# Altium PCB 175-00065revB - PCB, Sinistro Camera Controller Extension.PcbDoc
Units mil, origin at the board's own origin, x right, y up, seen from the top; angles counter-clockwise.
Board outline 2640 x 2640 mil, 2 copper layers (Top Layer, Bottom Layer), stack 61.2 mil thick; 32 components, 37 nets, 111 pads, 0 vias.
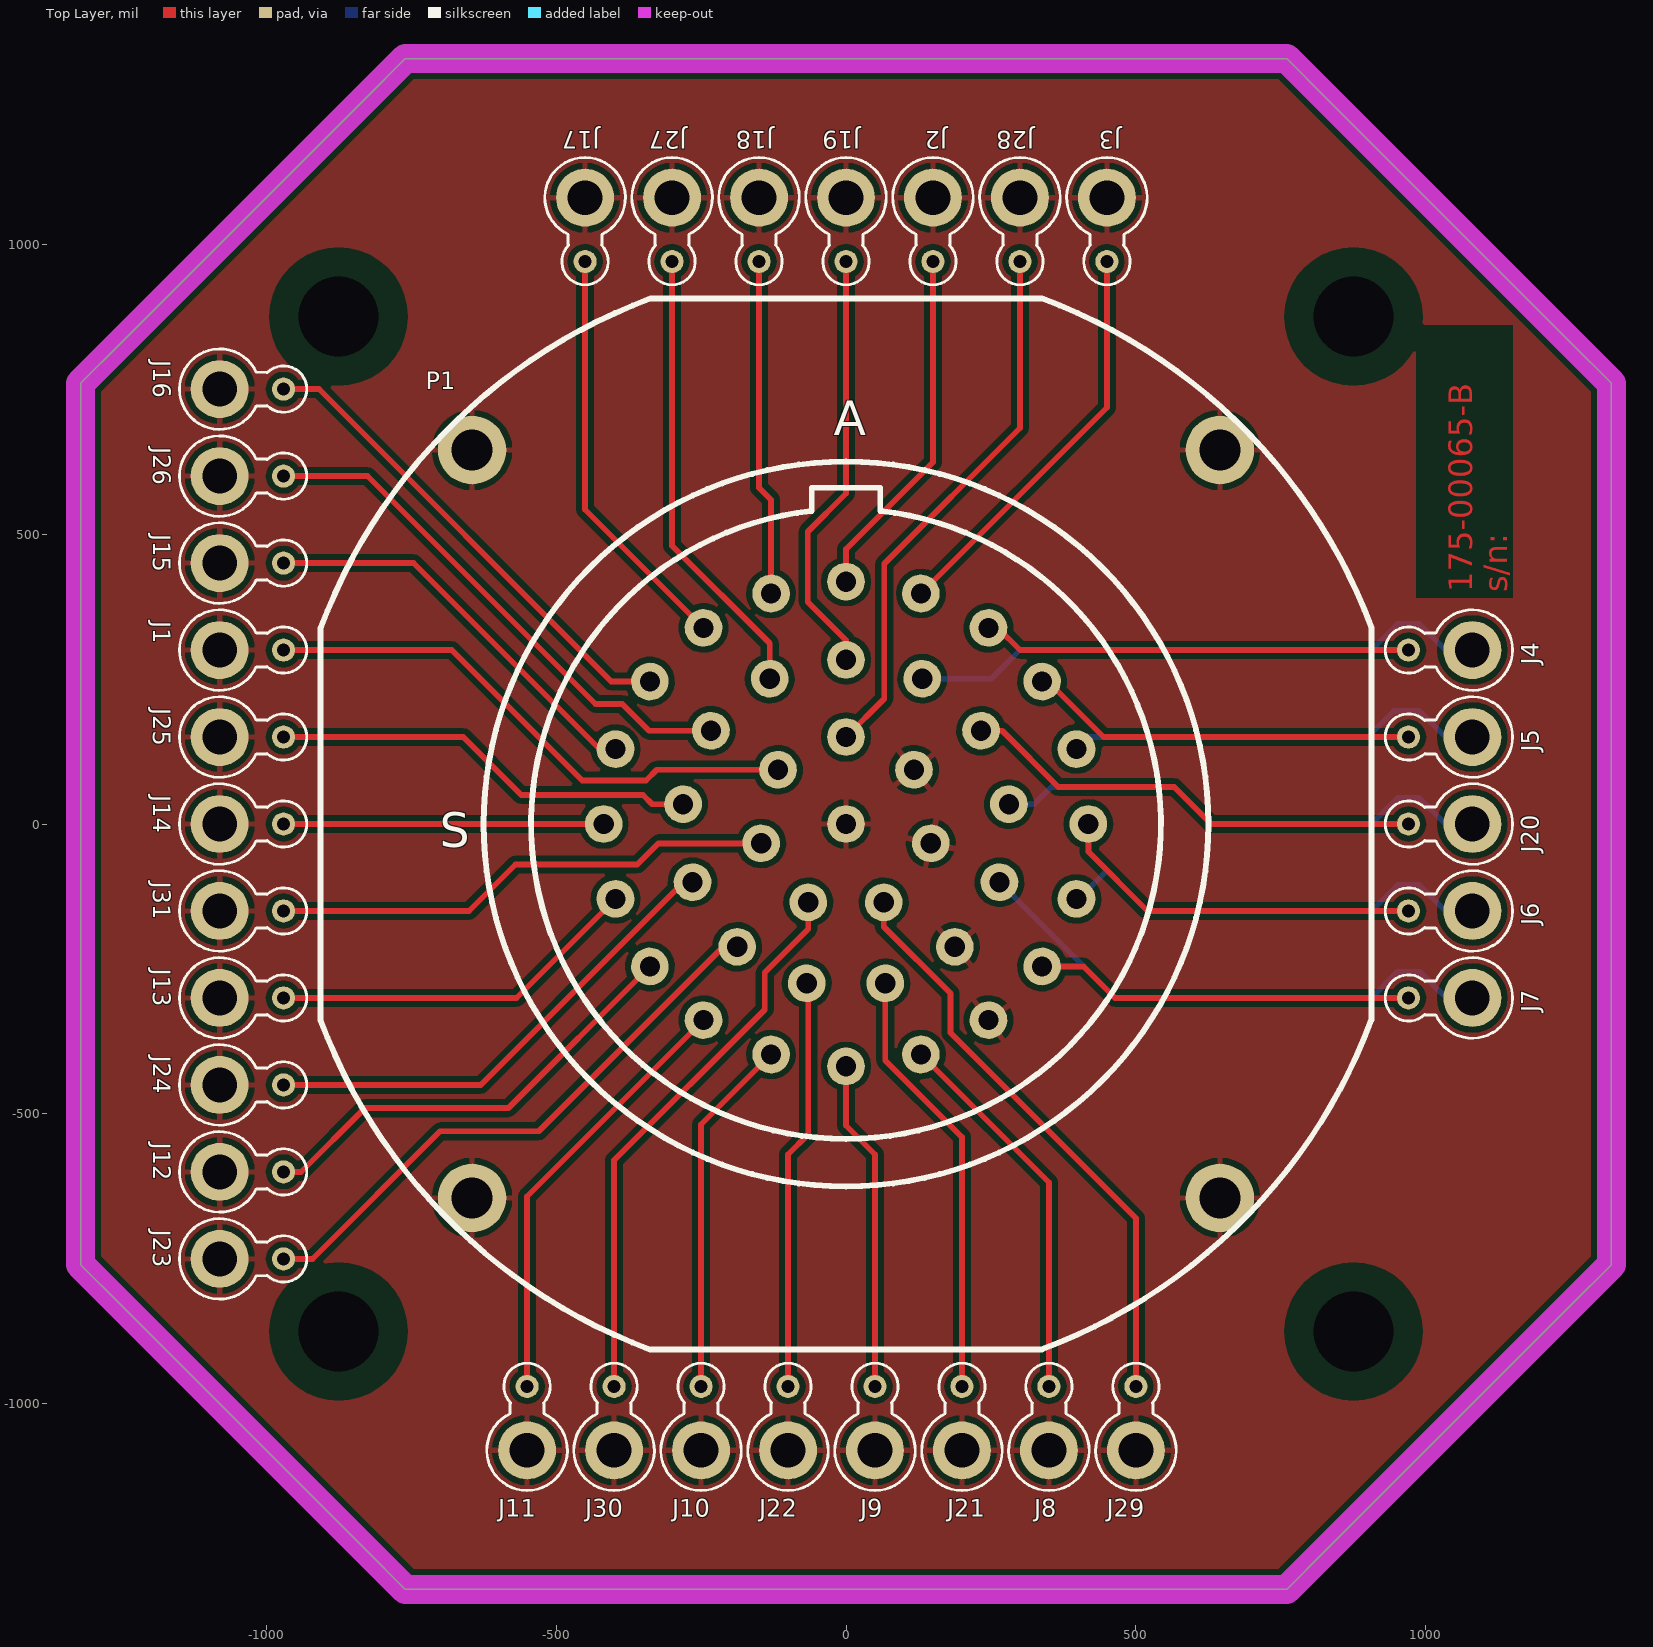
[diagram p0: Top Layer view]
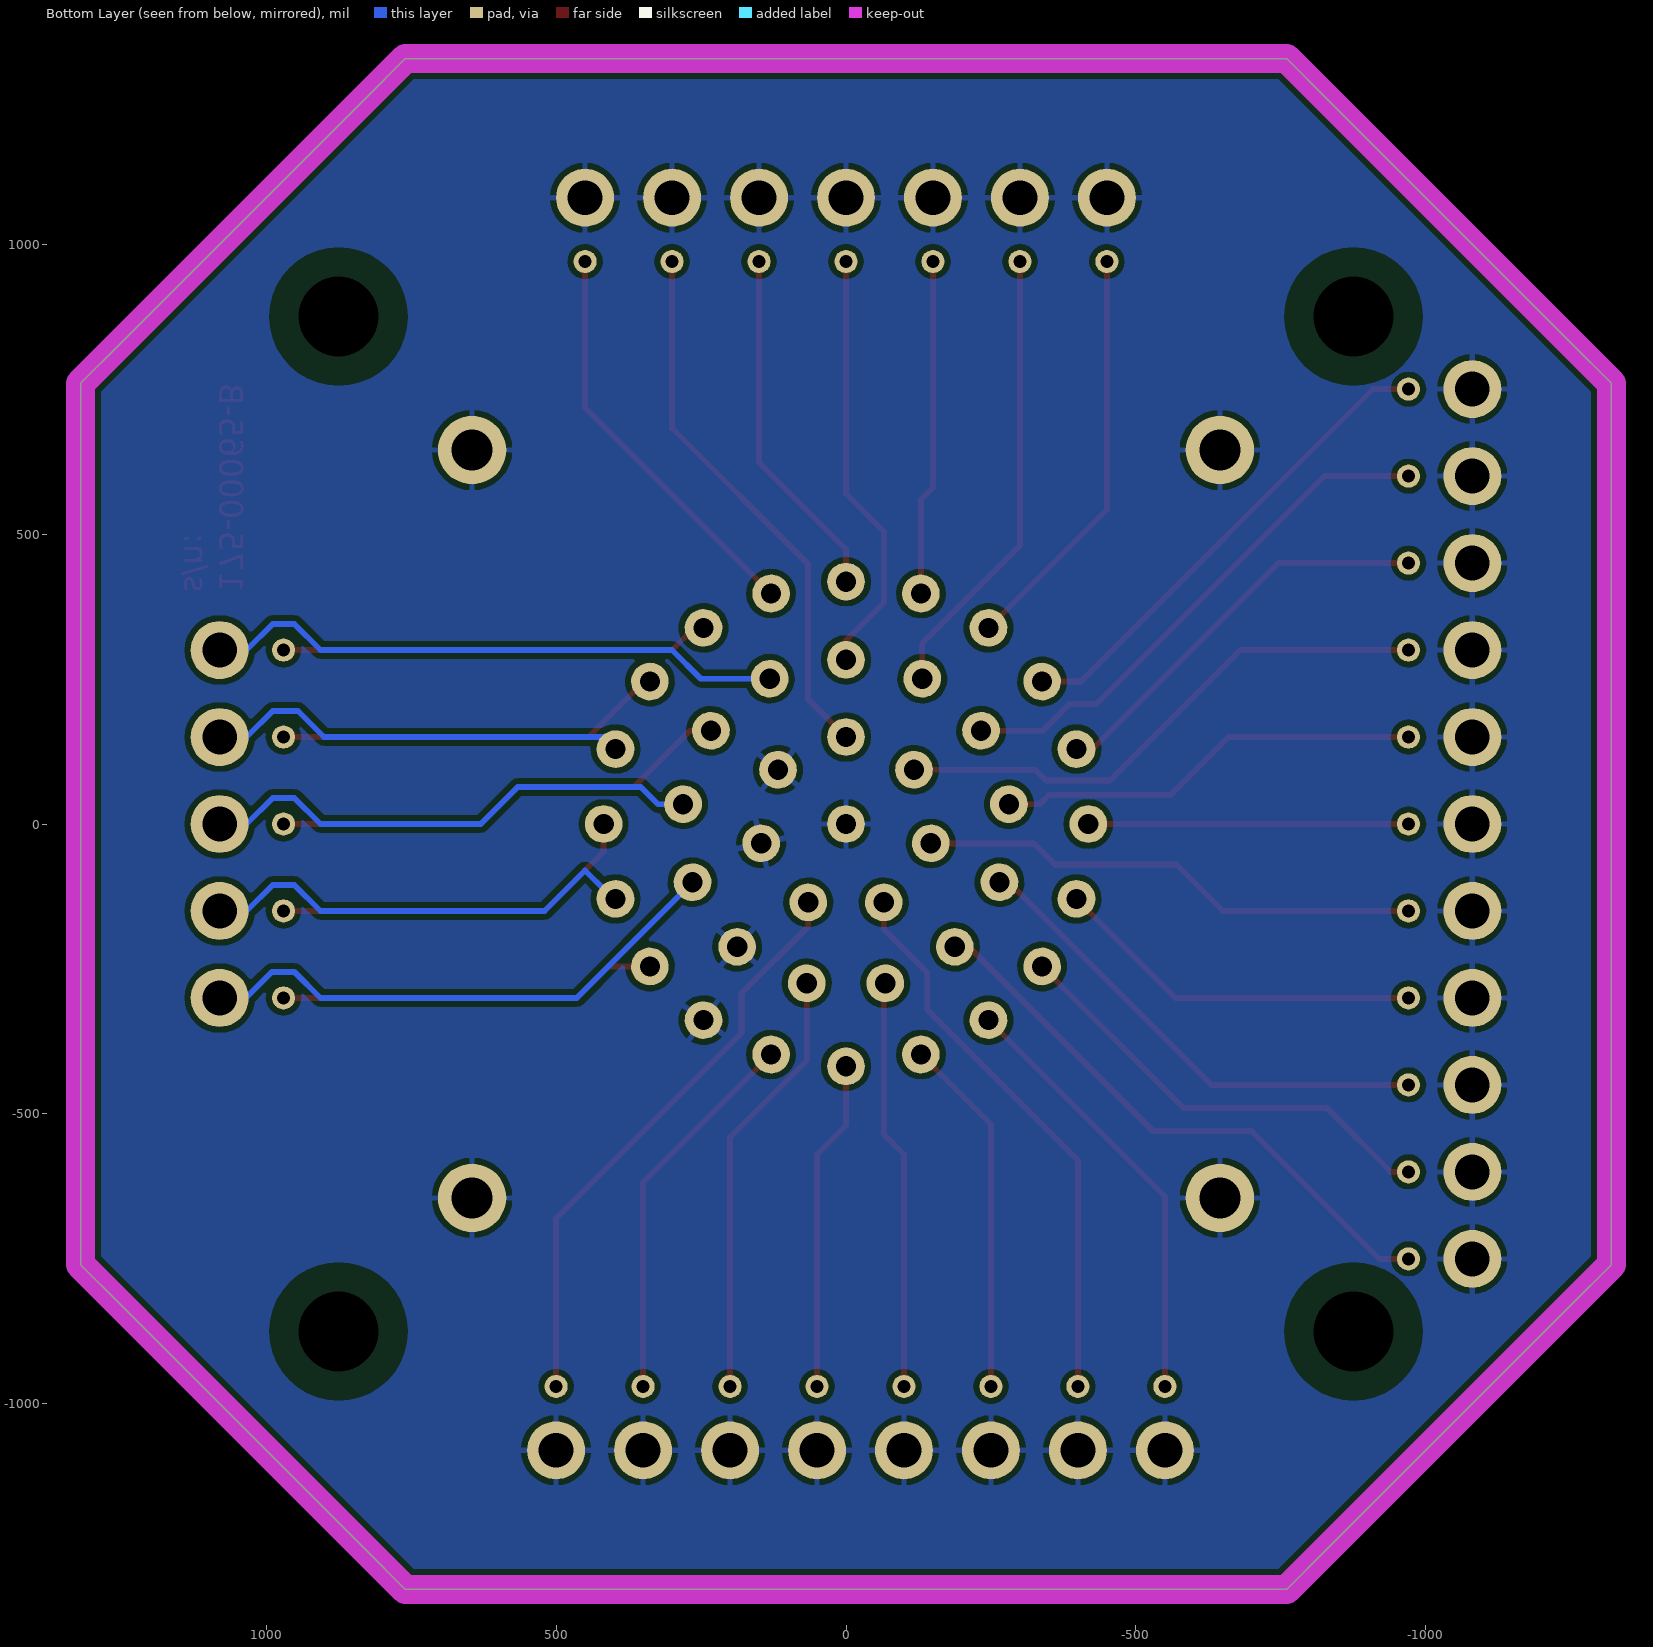
[diagram p1: Bottom Layer view, seen from below]

## Layer stack, top to bottom
Top Soldermask: solder mask 0.4, Solder Resist, Dk 3.5
Top Layer: signal copper 1.4
Dielectric 1: core 58.4, FR-4, Dk 4.2
Bottom Layer: signal copper 1.4
Bottom Soldermask: solder mask 0.4, Solder Resist, Dk 3.5

## Board outline
-1320,-760 -1250,-830 -830,-1250 -760,-1320 760,-1320 830,-1250 1250,-830 1320,-760 1320,760 1250,830 830,1250 760,1320 -760,1320 -830,1250 -1250,830 -1320,760

## Design rules (kind name [scope] priority, off if disabled: settings)
Clearance MountingHole1 [IsPad  And  HoleSize >= 100 vs InNet('GND')] p1: gap=50
Clearance Clearance_1 [All] p2: gap=10
ComponentClearance [All] p1: gap=6 collisioncheckmode=3 verticalgap=10 showdistances=FALSE
HoleSize [All] p1: absolutevalues=TRUE maxlimit=150 minlimit=1 maxpercent=80.000 minpercent=20.000
PlaneClearance PlaneClearance_1 [All] p1: clearance=20
PlaneConnect PlaneConnect_1 [All] p1: planeconnectstyle=Relief reliefexpansion=20 reliefentries=4 reliefconductorwidth=10 reliefairgap=10
PolygonConnect PolygonConnect_3 [All vs IsNamedPolygon('BottomGroundPourCS1')] p1 off: connectstyle=Direct reliefconductorwidth=10 reliefentries=4 polygonreliefangle="90 Angle" airgapwidth=10
PolygonConnect PolygonConnect_2 [All vs IsNamedPolygon('BottomGroundPour')] p2 off: connectstyle=Relief reliefconductorwidth=10 reliefentries=4 polygonreliefangle="90 Angle" airgapwidth=10
PolygonConnect PolygonConnect_1 [All vs IsNamedPolygon('BottomGroundPour')] p3 off: connectstyle=Relief reliefconductorwidth=10 reliefentries=4 polygonreliefangle="90 Angle" airgapwidth=20
PolygonConnect [All] p4: connectstyle=Relief reliefconductorwidth=10 reliefentries=4 polygonreliefangle="90 Angle" airgapwidth=10
RoutingVias [All] p1: holewidth=28 width=50 viastyle="Through Hole" minholewidth=28 minwidth=50 maxholewidth=28 maxwidth=50
SilkToSilkClearance [All] p1: silktosilkclearance=5
SolderMaskExpansion [All] p1: expansion=4
Width [All] p1: maxlimit=10 minlimit=10 preferedwidth=10
25 further rules are at their usual default settings.

## Components (designator, comment, footprint, x,y, rotation, side; value= is the part's Value field where it differs from the comment)
J1 "RG-178_CoaxTermination" RG-178_TERMINATION -970,300 r0 top
J2 "RG-178_CoaxTermination" RG-178_TERMINATION 150,970 r270 top
J3 "RG-178_CoaxTermination" RG-178_TERMINATION 450,970 r270 top
J4 "RG-178_CoaxTermination" RG-178_TERMINATION 970,300 r180 top
J5 "RG-178_CoaxTermination" RG-178_TERMINATION 970,150 r180 top
J6 "RG-178_CoaxTermination" RG-178_TERMINATION 970,-150 r180 top
J7 "RG-178_CoaxTermination" RG-178_TERMINATION 970,-300 r180 top
J8 "RG-178_CoaxTermination" RG-178_TERMINATION 350,-970 r90 top
J9 "RG-178_CoaxTermination" RG-178_TERMINATION 50,-970 r90 top
J10 "RG-178_CoaxTermination" RG-178_TERMINATION -250,-970 r90 top
J11 "RG-178_CoaxTermination" RG-178_TERMINATION -550,-970 r90 top
J12 "RG-178_CoaxTermination" RG-178_TERMINATION -970,-600 r0 top
J13 "RG-178_CoaxTermination" RG-178_TERMINATION -970,-300 r0 top
J14 "RG-178_CoaxTermination" RG-178_TERMINATION -970,0 r0 top
J15 "RG-178_CoaxTermination" RG-178_TERMINATION -970,450 r0 top
J16 "RG-178_CoaxTermination" RG-178_TERMINATION -970,750 r0 top
J17 "RG-178_CoaxTermination" RG-178_TERMINATION -450,970 r270 top
J18 "RG-178_CoaxTermination" RG-178_TERMINATION -150,970 r270 top
J19 "RG-178_CoaxTermination" RG-178_TERMINATION 0,970 r270 top
J20 "RG-178_CoaxTermination" RG-178_TERMINATION 970,0 r180 top
J21 "RG-178_CoaxTermination" RG-178_TERMINATION 200,-970 r90 top
J22 "RG-178_CoaxTermination" RG-178_TERMINATION -100,-970 r90 top
J23 "RG-178_CoaxTermination" RG-178_TERMINATION -970,-750 r0 top
J24 "RG-178_CoaxTermination" RG-178_TERMINATION -970,-450 r0 top
J25 "RG-178_CoaxTermination" RG-178_TERMINATION -970,150 r0 top
J26 "RG-178_CoaxTermination" RG-178_TERMINATION -970,600 r0 top
J27 "RG-178_CoaxTermination" RG-178_TERMINATION -300,970 r270 top
J28 "RG-178_CoaxTermination" RG-178_TERMINATION 300,970 r270 top
J29 "RG-178_CoaxTermination" RG-178_TERMINATION 500,-970 r90 top
J30 "RG-178_CoaxTermination" RG-178_TERMINATION -400,-970 r90 top
J31 "RG-178_CoaxTermination" RG-178_TERMINATION -970,-150 r0 top
P1 "125-00409 - MIL-DTL-26482 20-41 Pins, Jam nut" "MS-3116 Size 20-41, Male" 0,0 r0 top

## Footprints (in the part's own frame and the unit in brackets; to place one, negate y for a bottom-side part, rotate by r counter-clockwise, add the part's x,y. Pads: shape width x height; smd on the part's side, far side on the other; paste and mask are expansions set on the pad)
"MS-3116 Size 20-41, Male" [mil] "Round Size 20, 41 pos, Male Pins"
  round 65 hole 35: A(0,418) aa(280.94,34.1) B(129.17,397.54) bb(264.6,-100.37) C(245.69,338.17) cc(187.65,-211.84) D(338.17,245.69) dd(67.72,-274.78) E(397.54,129.17) ee(-67.74,-274.77) F(418,0) ff(-187.67,-211.82) G(397.54,-129.17) gg(-264.61,-100.35) H(338.17,-245.69) hh(-280.94,34.12) ii(-232.9,160.76) J(245.69,-338.17) jj(-131.52,250.58) K(129.17,-397.54) kk(0,150) L(0,-418) M(-129.17,-397.54) mm(117.28,93.52) N(-245.69,-338.17) nn(146.24,-33.39) P(-338.17,-245.69) pp(65.08,-135.15) qq(-65.09,-135.14) R(-397.54,-129.17) rr(-146.24,-33.38) S(-418,0) ss(-117.27,93.52) T(-397.54,129.17) tt(0,0) U(-338.17,245.69) V(-245.69,338.17) W(-129.17,397.54) X(0,283) Y(131.53,250.58) Z(232.91,160.75)
  round 118.11 / inner round 60 / far side round 118.11 hole 70.87: cs1(-644.88,-644.88) cs2(644.88,-644.88) cs3(644.88,644.88) cs4(-644.88,644.88)
  silkscreen extent -906,-906 906,906
RG-178_TERMINATION [mil] "RG-178 Solder Termination in a PCB"
  round 40 hole 22: 1(0,0)
  round 100 hole 60: GND(-110,0)
  silkscreen extent -179,-69 40,69

## Part data
J1: "Coax termination"

## Free pads (board coordinates)
  round 0 hole 137.8 unplated: 0(-875,-875) 0(-875,875) 0(875,-875) 0(875,875)

## Nets (pads, with @x,y where several pads share a name; then routed paths per layer and width w, separated by ;. In a path a pad name is that pad's centre, name@x,y a point inside that pad or via, vN(x,y) a via of type N, cw(c..) or ccw(c..) an arc to the next point about the centre after c; other vN are vias at no path point)
A1_OUT: J3.1 P1.B | length 705.4
  Top Layer w10: P1.B 450,718.37 J3.1
A2_OUT: J18.1 P1.W | length 581.1
  Top Layer w10: J18.1 -150,580 -129.17,559.17 P1.W
A3_OUT: J27.1 P1.jj | length 789.2
  Top Layer w10: J27.1 -300,480 -131.52,311.52 P1.jj
A4_OUT: J28.1 P1.kk | length 944.3
  Top Layer w10: P1.kk 66,216 66,449 300,683 J28.1
COLDBLK_+: J20.1 P1.Z | length 803.7
  Top Layer w10: P1.Z 269.25,160.75 366,64 566,64 630,0 J20.1
COLDBLK_-: J20.GND P1.aa | length 915.2
  Bottom Layer w10: P1.aa 324.1,34.1 354,64 566,64 630,0 906.36,0 951.36,45 988.64,45 1033.64,0 J20.GND@1120,0
GND: J1.GND J2.GND J3.GND J8.GND J9.GND J10.GND J11.GND J12.GND J13.GND J14.GND J15.GND J16.GND J17.GND J18.GND J19.GND J21.GND J22.GND J23.GND J24.GND J25.GND J26.GND J27.GND J28.GND J29.GND J30.GND J31.GND P1.cc P1.cs1 P1.cs2 P1.cs3 P1.cs4 P1.J P1.mm P1.nn P1.tt
HEATER_+: J4.1 P1.C | length 740.1
  Top Layer w10: P1.C 261.83,338.17 300,300 J4.1
HEATER_-: J4.GND P1.Y | length 1046.2
  Bottom Layer w10: P1.Y 250.58,250.58 300,300 906.36,300 951.36,345 988.64,345 1033.64,300 J4.GND@1120,300
OD: J19.1 P1.X | length 741.7
  Top Layer w10: P1.X 0,317 -66,383 -66,504 0,570 J19.1
OG: J2.1 P1.A | length 614.1
  Top Layer w10: P1.A 0,474 150,624 J2.1
P1A: J16.1 P1.U | length 840.7
  Top Layer w10: J16.1 -909,750 -404.69,245.69 P1.U
P1B: J15.1 P1.T | length 705.4
  Top Layer w10: J15.1 -746,450 -425.17,129.17 P1.T
P2A: J26.1 P1.ii | length 919
  Top Layer w10: J26.1 -825,600 -432,207 -386,207 -339.76,160.76 P1.ii
P2B: J25.1 P1.hh | length 737.1
  Top Layer w10: J25.1 -660,150 -560,50 -350,50 -334.12,34.12 P1.hh
P3A: J1.1 P1.ss | length 953.6
  Top Layer w10: J1.1 -680,300 -455,75 -345,75 -326.48,93.52 P1.ss
P3B: J31.1 P1.rr | length 872.1
  Top Layer w10: J31.1 -650,-150 -570,-70 -360,-70 -323.38,-33.38 P1.rr
RD: J17.1 P1.V | length 716.5
  Top Layer w10: J17.1 -450,542.47 P1.V
RG: J10.1 P1.M | length 622.5
  Top Layer w10: J10.1 -250,-518.37 P1.M
RTD_CB_+: J7.1 P1.H | length 654.3
  Top Layer w10: P1.H 409.69,-245.69 464,-300 J7.1
RTD_CB_-: J7.GND P1.bb | length 975.4
  Bottom Layer w10: P1.bb 464.24,-300 906.36,-300 951.36,-255 990,-255 1035,-300 J7.GND@1120,-300
RTDF_+: J6.1 P1.F | length 642.2
  Top Layer w10: P1.F 418,-48 520,-150 J6.1
RTDF_-: J6.GND P1.G | length 804.2
  Bottom Layer w10: P1.G@397.54,-117.46 412.54,-117.46 450,-80 520,-150 906.36,-150 951.36,-105 988.64,-105 1033.64,-150 J6.GND@1120,-150
RTDS_+: J5.1 P1.D | length 671.5
  Top Layer w10: P1.D 348.19,245.69 443.89,150 J5.1
RTDS_-: J5.GND P1.E | length 740.1
  Top Layer w10: P1.E P1.E@398.37,130
  Bottom Layer w10: P1.E@418.37,150 900,150 945,195 988.64,195 1033.64,150 J5.GND@1120,150
S1Q1: J8.1 P1.K | length 663.9
  Top Layer w10: P1.K 350,-618.37 J8.1
S1Q2: J9.1 P1.L | length 572.7
  Top Layer w10: P1.L 0,-520 50,-570 J9.1
S1Q3: J13.1 P1.R | length 643.2
  Top Layer w10: J13.1 -568.37,-300 P1.R
S1Q4: J14.1 P1.S | length 552
  Top Layer w10: J14.1 P1.S
S2Q1: J21.1 P1.dd | length 750
  Top Layer w10: P1.dd 67.72,-407.72 200,-540 J21.1
S2Q2: J22.1 P1.ee | length 712.1
  Top Layer w10: J22.1 -100,-570 -65,-535 P1.ee@-65,-280.51 ; P1.ee P1.ee@-62,-280.51
S2Q3: J23.1 P1.ff | length 1035.3
  Top Layer w10: J23.1 -920,-750 ; -950,-750 -920,-750 ; P1.ff -211.82,-211.82 -530,-530 -700,-530 -920,-750
S2Q4: J24.1 P1.gg | length 850.2
  Top Layer w10: J24.1 -630,-450 -280.35,-100.35 P1.gg
S3: J11.1 P1.N | length 757.9
  Top Layer w10: J11.1 -550,-642.47 P1.N
SG: J12.1 P1.P | length 778.6
  Top Layer w10: J12.1 -940,-600 -830,-490 -582.47,-490 P1.P
TGA: J29.1 P1.pp | length 1015
  Top Layer w10: P1.pp 65.08,-177.14 180,-292.06 180,-360 500,-680 J29.1
TGB: J30.1 P1.qq | length 973.6
  Top Layer w10: J30.1 -400,-580 -140.17,-320.17 -140.17,-256.17 -65.09,-181.09 P1.qq

## Polygon pours and split planes (outlines as drawn)
GND on Top Layer "GND_L01_P008" (solid, remove dead copper, pour order 8): -1630,1450 -1590,1410 -1590,-1340 1580,-1340 1660,-1420 1500,-1260 1500,1420
GND on Bottom Layer "GND_L02_P010" (solid, remove dead copper, pour order 10): -1630,1450 -1630,-1380 -1590,-1420 -1560,-1450 1460,-1450 1460,1510 1470,1520

## Keep-outs
Keep-Out Layer:
  lines w50: -1320,-760 -1320,760 -760,1320 760,1320 1320,760 1320,-760 760,-1320 -760,-1320 -1320,-760

## Other copper
Top Layer:
  text "175-00065-B / s/n:" at 1140,400 h40 r90

## Silkscreen, mask and mechanical layers (free items; w line width, h text height)
Mechanical 1:
  the board outline again, w10
Mechanical 2:
  drawing of 267 lines, arcs and shapes, not listed
  text "DIMENSIONS IN INCHES" at -450,1950 h60
  text "FABRICATION NOTES /  /   GENERAL /     1) Manufactuered in accordance with IPC-6012B Class 1 /     2) Number of layers: 2 /     3) Finished thickness: 0.062 /     4) Base material: FR4 /     5) Plating: Gold immersion /     6) Solder mask color: Black /  /   EXCEPTIONS /     7) Silkscreen on top only /     8) Minimum dielectric thickness is 0.031 in /     9) All drill hole sizes and tolerances apply after plating /    10) All plated holes and surfaces gold immersion plated to preserve /        solderability /  /   ROUTING TOLERANCES /    12) X.XX  = +/- 0.02 in /    13) X.XXX = +/- 0.005 in /  /   LAYER STACK /     *.GTL - 1 Oz. Cu (finished) TOP LAYER GERBER DATA /     *.GBL - 1 Oz. Cu (finished) BOTTOM LAYER GERBER DATA /     *.GTS - TOP LAYER SOLDERMASK /     *.GBS - BOTTOM LAYER SOLDERMASK /     *.GTO - TOP LAYER (ONLY) SILKSCREEN /     *.GD1 - DRILL DRAWING /     *.GM1 - BOARD OUTLINE /     *.GM2 - BOARD DRAWING AND NOTES" at -10050,475 h75
  text "Layer" at -9884.37,-950 h60
  text "Name" at -9474.46,-950 h60
  text "Material" at -8374.77,-950 h60
  text "Thickness" at -7515,-950 h60
  text "Constant" at -6865.16,-950 h60
  text "Board Layer Stack" at -6295.3,-950 h60
  text "1" at -9884.37,-1070 h60
  text "Top Silkscreen" at -9474.46,-1070 h60
  text "2" at -9884.37,-1190 h60
  text "Top Soldermask" at -9474.46,-1190 h60
  text "Solder Resist" at -8374.77,-1190 h60
  text "0.40mil" at -7515,-1190 h60
  text "3.5" at -6865.16,-1190 h60
  text "3" at -9884.37,-1310 h60
  text "Top Layer" at -9474.46,-1310 h60
  text "Copper" at -8374.77,-1310 h60
  text "1.40mil" at -7515,-1310 h60
  text "4" at -9884.37,-1430 h60
  text "Dielectric 1" at -9474.46,-1430 h60
  text "FR-4" at -8374.77,-1430 h60
  text "58.40mil" at -7515,-1430 h60
  text "4.2" at -6865.16,-1430 h60
  text "5" at -9884.37,-1550 h60
  text "Bottom Layer" at -9474.46,-1550 h60
  text "Copper" at -8374.77,-1550 h60
  text "1.40mil" at -7515,-1550 h60
  text "6" at -9884.37,-1670 h60
  text "Bottom Soldermask" at -9474.46,-1670 h60
  text "Solder Resist" at -8374.77,-1670 h60
  text "0.40mil" at -7515,-1670 h60
  text "3.5" at -6865.16,-1670 h60
  text "Las Cumbres Observatory" at 1879.87,-4381 h150
  text "Global Telescope Network" at 2039.87,-4541 h125
  text "LCOGT / 6740 Cortona Dr., Ste. 102 / Goleta, CA 93117 / www.lcogt.net" at 3870,-4627.49 h60
  text "DATE" at 1704.87,-4821.8 h32
  text "DESIGNED" at 2644.87,-4821.8 h32
  text "DRAWN" at 3724.87,-4821.8 h32
  text "SCALE" at 4804.87,-4821.8 h32
  text "J. De Vera" at 4029.87,-4921 h55
  text ".Print_Date" at 1870,-4926 h55
  text "J. De Vera" at 2904.87,-4926 h55
  text "1 : 1" at 5089.87,-4940 h90
  text "CHECKED/DATE" at 1704.87,-5111.8 h32
  text "APPROVED/DATE" at 3724.87,-5111.8 h32
  text "TITLE" at 1704.87,-5401.8 h32
  text "175-00065-B   Sinistro Camera Controller Extension" at 1820,-5552.49 h100
  text "SIZE" at 1704.87,-5731.8 h32
  text "DOC NO." at 2164.87,-5731.8 h32
  text "REV" at 4244.87,-5731.8 h32
  text "SHEET" at 4704.87,-5731.8 h32
  text "OF" at 5134.87,-5835 h60
  text "1" at 4964.87,-5855 h100
  text "1" at 5364.87,-5855 h100
  text "B" at 4389.87,-5868 h130
  text "-" at 2719.87,-5870 h130
  text "GPT" at 3439.6,-5884.79 h130
  text "B" at 1839.87,-5886 h100
  text "NOTICE: / This drawing embodies a proprietary design owned by Las Cumbres Observatory / Global Telescope Network, Inc. It is submitted for a specific purpose under a / confidential relationship, and except for purposes expressly granted in / writing, all rights are reserved by Las Cumbres Observatory." at -10175,-5925 h60
Mechanical 8:
  circle w10: c0,0 r1574.8
  text "Size of pass-thru" at 925,-1550 h60
Drill Drawing:
  circle w10: c-9849.38,-2414.17 r33.33
  lines w10: -9882.71,-2880.83 -9866.04,-2880.83 -9849.38,-2897.5 -9832.71,-2880.83 -9816.04,-2880.83 -9832.71,-2864.17 -9816.04,-2847.5 -9832.71,-2847.5 -9849.38,-2830.83 -9866.04,-2847.5 -9882.71,-2847.5 -9866.04,-2864.17 -9882.71,-2880.83 ; -9882.71,-2230.83 -9816.04,-2230.83 -9849.38,-2297.5 -9882.71,-2230.83
  lines w15: -9942.5,-2942.5 -6063.53,-2942.5 ; -9942.5,-2192.5 -6063.53,-2192.5 ; -9391.62,-3092.5 -9391.62,-2042.5 ; -8693.81,-3092.5 -8693.81,-2042.5 ; -7348.21,-3092.5 -7348.21,-2042.5 ; -6842.33,-3092.5 -6842.33,-2042.5 ; -9942.5,-3092.5 -6063.53,-3092.5 -6063.53,-2042.5 -9942.5,-2042.5 -9942.5,-3092.5
  text "Symbol" at -9852.5,-2147.5 h72
  text "Hit Count" at -9346.62,-2147.5 h72
  text "Finished Hole Size" at -8648.81,-2147.5 h72
  text "Plated" at -7303.21,-2147.5 h72
  text "Hole Type" at -6797.33,-2147.5 h72
  text "4" at -9346.62,-2297.5 h60
  text "70.87mil (1.800mm)" at -8648.81,-2297.5 h60
  text "PTH" at -7303.21,-2297.5 h60
  text "Round" at -6797.33,-2297.5 h60
  text "4" at -9346.62,-2447.5 h60
  text "137.80mil (3.500mm)" at -8648.81,-2447.5 h60
  text "NPTH" at -7303.21,-2447.5 h60
  text "Round" at -6797.33,-2447.5 h60
  text "31" at -9346.62,-2597.5 h60
  text "22.00mil (0.559mm)" at -8648.81,-2597.5 h60
  text "PTH" at -7303.21,-2597.5 h60
  text "Round" at -6797.33,-2597.5 h60
  text "B" at -9881.59,-2607.49 h66.67
  text "31" at -9346.62,-2747.5 h60
  text "60.00mil (1.524mm)" at -8648.81,-2747.5 h60
  text "PTH" at -7303.21,-2747.5 h60
  text "Round" at -6797.33,-2747.5 h60
  text "A" at -9881.59,-2757.49 h66.67
  text "41" at -9346.62,-2897.5 h60
  text "35.00mil (0.889mm)" at -8648.81,-2897.5 h60
  text "PTH" at -7303.21,-2897.5 h60
  text "Round" at -6797.33,-2897.5 h60
  text "111 Total" at -9346.62,-3047.5 h60

## Dimensions
760,1320 to 760,-1320 on Mechanical 2
-1320,760 to 1320,760 on Mechanical 2

## Text inside footprints (layer, text, board x,y; h text height)
P1: Top Silkscreen "S" at -700.94,-40 h60; Top Silkscreen "A" at -20.94,670 h60